# Altium PCB 8 Motors.PcbDoc (part 4 of 4)
Units mm, origin at the board's own origin, x right, y up, seen from the top; angles counter-clockwise.
Board outline 155 x 95 mm, 4 copper layers (Top Layer, GND, POWER, Bottom Layer), stack 0.778 mm thick; 196 components, 175 nets, 825 pads, 449 vias.
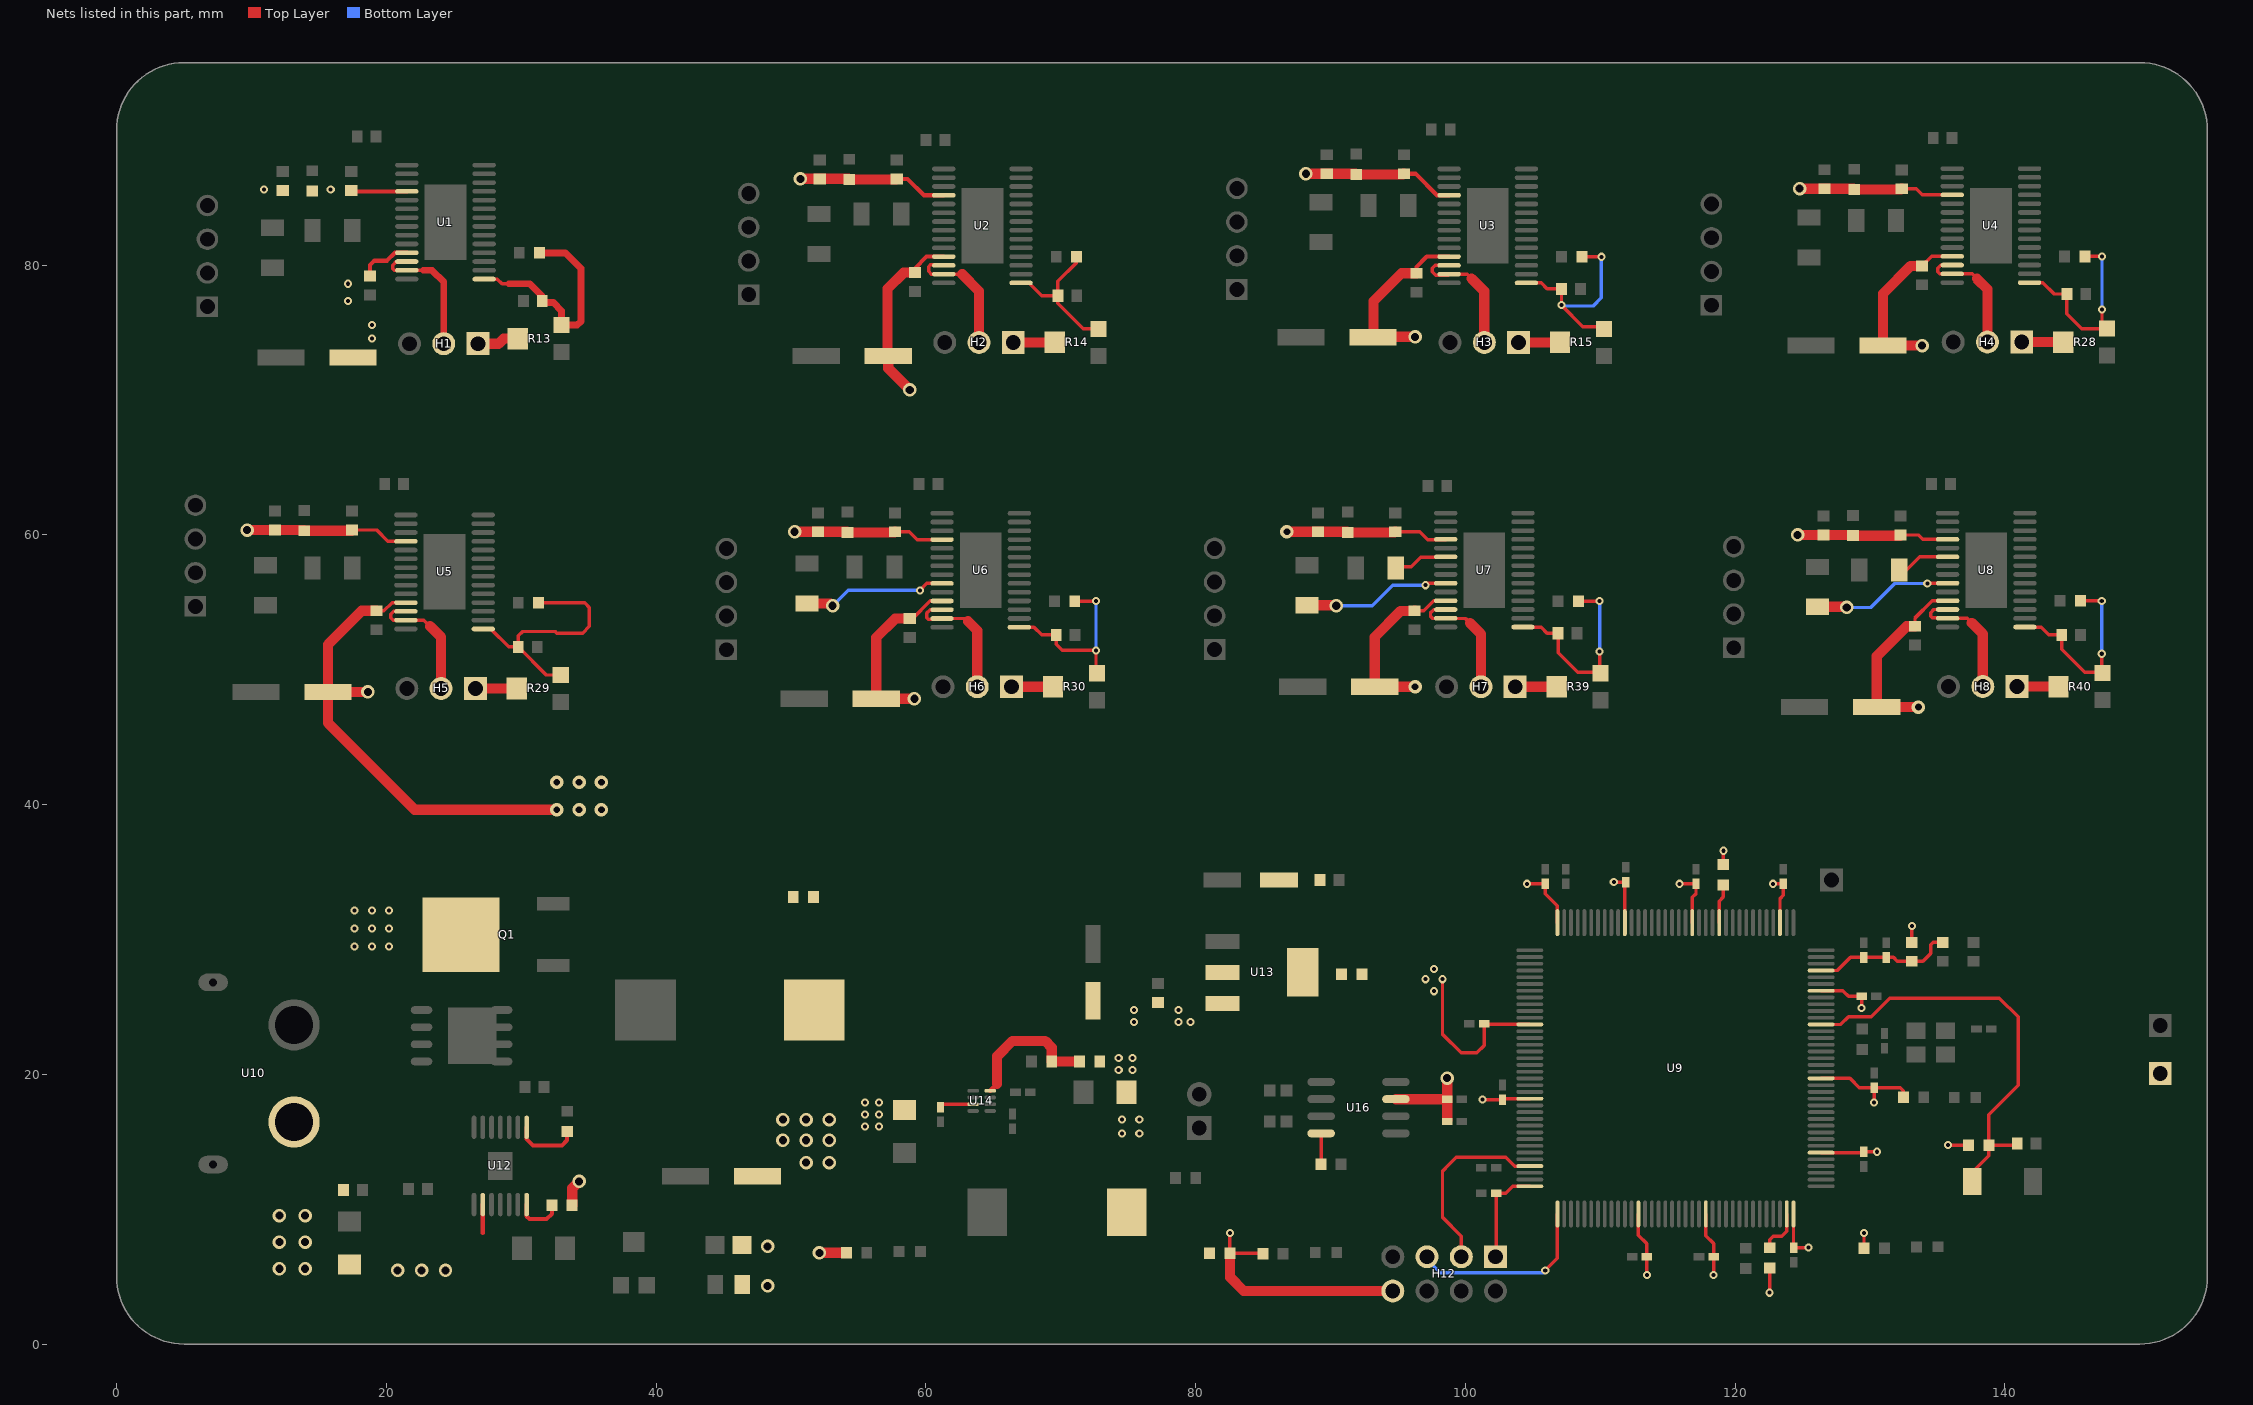
[diagram p5: the nets of this part, all layers, seen from the top]

## Via types
v1: diameter 0.6, hole 0.3, Top Layer to Bottom Layer, tented both sides, 222 vias
v2: diameter 0.5, hole 0.3, Top Layer to Bottom Layer, tented both sides, 96 vias
v3: diameter 1, hole 0.6, Top Layer to Bottom Layer, tented both sides, 88 vias
v4: diameter 1, hole 0.6, Top Layer to Bottom Layer, 17 vias
v5: diameter 1, hole 0.5, Top Layer to Bottom Layer, tented both sides, 16 vias
v6: diameter 4, hole 3.2, Top Layer to Bottom Layer, tented both sides, 4 vias
v7: diameter 0.61, hole 0.305, Top Layer to Bottom Layer, tented both sides, 4 vias
v8: diameter 0.6, hole 0.3, Top Layer to Bottom Layer, 2 vias

## Nets (pads, with @x,y where several pads share a name; then routed paths per layer and width w, separated by ;. In a path a pad name is that pad's centre, name@x,y a point inside that pad or via, vN(x,y) a via of type N, cw(c..) or ccw(c..) an arc to the next point about the centre after c; other vN are vias at no path point) (continued)
NetR24_2: R24.2 U6.9 | length 10.8
  Top Layer w0.254: v1(59.563,55.88) 60.078,56.395 U6.9@61.197,56.395
  Top Layer w0.762: R24.2@51.181,54.909 52.914,54.909 v3(53.086,54.737)
  Bottom Layer w0.254: v3(53.086,54.737) 54.229,55.88 v1(59.563,55.88)
NetR33_2: R33.2 U7.6 | length 4
  Top Layer w0.254: R33.2@94.824,57.624 95.978,57.624 96.699,58.345 U7.6@98.535,58.345
NetR34_2: R34.2 U8.6 | length 4
  Top Layer w0.254: R34.2@132.162,57.404 132.715,57.404 133.671,58.36 U8.6@135.746,58.36
NetR35_2: R35.2 U7.9 | length 11
  Top Layer w0.254: v1(97.028,56.261) 97.162,56.395 U7.9@98.535,56.395
  Top Layer w0.762: R35.2@88.265,54.782 90.379,54.782 v3(90.424,54.737)
  Bottom Layer w0.254: v3(90.424,54.737) 93.091,54.737 94.615,56.261 v1(97.028,56.261)
NetR36_2: R36.2 U8.9 | length 10.4
  Top Layer w0.254: v3@128.225,54.655 v3(128.27,54.61) ; v1(134.239,56.388) 134.261,56.41 U8.9@135.746,56.41
  Top Layer w0.762: R36.2@126.111,54.655 v3@128.225,54.655
  Bottom Layer w0.254: v3(128.27,54.61) 130.048,54.61 131.826,56.388 v1(134.239,56.388)
NetR41_2: R41.2 U9.143 | length 3.4
  Top Layer w0.254: R41.2@122.555,7.141 122.555,7.747 122.809,8.001 123.444,8.001 123.82,8.377 U9.143@123.82,9.647
NetR47_1: R47.1 U12.8 | length 4.9
  Top Layer w0.305: U12.8@30.398,16.074 30.398,15.195 30.861,14.732 33.02,14.732 33.401,15.113 R47.1@33.401,15.757
NetR50_1: R50.1 R51.2 U14.8 | length 10.6
  Top Layer w0.305: U14.8@64.767,18.784 65.278,19.295
  Top Layer w0.762: 65.278,19.295 65.278,21.336 66.421,22.479 68.834,22.479 69.333,21.98 R51.2@69.333,20.955 R50.1@71.383,20.955
NetR56_1: R56.1 U16.8 | length 2.3
  Top Layer w0.254: R56.1@89.281,13.335 89.303,13.357 U16.8@89.303,15.621
NetU11_1: U11.1 U12.7 | length 3.6
  Top Layer w0.305: U12.7@30.398,10.342 30.398,9.48 30.607,9.271 31.877,9.271 32.267,9.661 U11.1@32.267,10.287
"PB2 BOOT1": R44.1 U9.48 | length 2.9
  Top Layer w0.254: U9.48@118.82,31.247 118.82,32.841 119.126,33.147 R44.1@119.126,34.045
R_Vref1: H1.1 R13.2 | length 3.1
  Top Layer w0.762: H1.1@26.797,74.168 28.321,74.168 28.702,74.549 R13.2@29.744,74.549
R_Vref2: H2.1 R14.2 | length 3.1
  Top Layer w0.762: H2.1@66.476,74.261 R14.2@69.55,74.261
R_Vref3: H3.1 R15.2 | length 3.1
  Top Layer w0.762: H3.1@103.941,74.261 R15.2@107.015,74.261
R_Vref4: H4.1 R28.2 | length 3.1
  Top Layer w0.762: H4.1@141.241,74.286 R28.2@144.315,74.286
R_Vref5: H5.1 R29.2 | length 3.1
  Top Layer w0.762: H5.1@26.598,48.607 R29.2@29.672,48.607
R_Vref6: H6.1 R30.2 | length 3.1
  Top Layer w0.762: H6.1@66.349,48.734 R30.2@69.423,48.734
R_Vref7: H7.1 R39.2 | length 3.1
  Top Layer w0.762: H7.1@103.687,48.734 R39.2@106.761,48.734
R_Vref8: H8.1 R40.2 | length 3.1
  Top Layer w0.762: H8.1@140.898,48.749 R40.2@143.972,48.749
RESET: C67.2 R45.1 SW1.1 U9.25 | length 31.7
  Top Layer w0.254: U9.25@126.37,23.697 127.837,23.697 128.397,24.257 130.074,24.257 131.471,25.654 139.573,25.654 140.97,24.257 140.97,19.177 138.802,17.009 R45.1@138.802,14.753 ; SW1.1@137.577,12.065 137.577,12.736 138.802,13.961 R45.1@138.802,14.753 ; C67.2@140.905,14.859 140.799,14.753 R45.1@138.802,14.753
SWCLK: H12.5 U9.109 | length 14
  Top Layer w0.254: v1(105.918,5.461) 106.82,6.363 U9.109@106.82,9.647
  Bottom Layer w0.254: H12.5@97.155,6.477 97.155,6.276 98.134,5.297 105.754,5.297 v1(105.918,5.461)
SWDIO: H12.3 U9.105 | length 14.1
  Top Layer w0.254: H12.3@99.695,6.477 99.695,8.001 98.298,9.398 98.298,12.827 98.811,13.34 98.811,13.342 99.312,13.843 102.997,13.843 103.643,13.197 U9.105@104.77,13.197
VCC_+3.3V: C49.1 C55.1 C56.1 C57.1 C58.1 C59.1 C60.1 C61.1 C62.1 C63.1 C64.1 C65.1 C66.1 C86.1 C87.1 H11.1 H12.1 L1.2 R41.1 R44.2 R45.2 R46.2 R52.2 R54.2 U9.6 U9.17 U9.30 U9.39 U9.52 U9.62 U9.72 U9.84 U9.95 U9.108 U9.121 U9.131 U9.144 U16.3 | length 83.5
  Top Layer w0.254: v1(98.298,27.051) 98.298,22.987 99.695,21.59 100.838,21.59 101.383,22.135 C64.1@101.383,23.727 ; v1(101.256,18.124) C66.1@102.743,18.124 102.816,18.197 U9.95@104.77,18.197 ; C64.1@101.383,23.749 C64.1@101.383,23.727 ; H12.1@102.235,6.477 102.272,6.514 C61.1@102.272,11.176 102.997,11.176 103.518,11.697 U9.108@104.77,11.697 ; v1(104.558,34.126) C57.1@105.918,34.126 105.918,33.401 106.82,32.499 U9.72@106.82,31.247 ; U9.84@104.77,23.697 104.74,23.727 C64.1@101.383,23.727 ; v1(110.998,34.253) C56.1@111.887,34.253 111.82,34.186 U9.62@111.82,31.247 ; U9.121@112.82,9.647 112.82,8.084 113.448,7.456 C62.1@113.448,6.477 v1(113.448,5.117) ; v1(115.861,34.126) C55.1@117.094,34.126 117.094,33.401 116.82,33.127 U9.52@116.82,31.247 ; U9.131@117.82,9.647 117.82,8.037 118.401,7.456 C63.1@118.401,6.477 v1(118.401,5.117) ; R44.2@119.126,35.551 v1(119.126,36.576) ; v1(122.555,3.81) R41.1@122.555,5.634 ; v1(122.809,34.126) C58.1@123.571,34.126 123.571,33.274 123.32,33.023 U9.39@123.32,31.247 ; U9.144@124.32,9.647 124.32,7.162 C65.1@124.333,7.149 v1(125.439,7.149) ; U9.6@126.37,14.197 129.476,14.197 C49.1@129.54,14.261 v1(130.519,14.261) ; U9.17@126.37,19.697 128.512,19.697 129.196,19.013 C59.1@130.302,19.013 ; U9.30@126.37,26.197 127.979,26.197 128.009,26.167 128.011,26.167 128.397,25.781 C60.1@129.376,25.781 v1(129.376,24.929) ; R52.2@129.549,7.112 v1(129.549,8.246) ; v1(130.302,17.907) C59.1@130.302,19.013 ; R46.2@132.47,18.288 132.47,18.787 132.244,19.013 C59.1@130.302,19.013 ; L1.2@133.096,29.783 v1(133.096,30.988) ; v1(135.784,14.753) R45.2@137.296,14.753
  Top Layer w0.762: U16.3@94.847,18.161 C86.1@98.642,18.161 ; C87.1@98.642,16.637 C86.1@98.642,18.161 ; v3(98.642,19.722) C86.1@98.642,18.161
  other v1: 97.663,26.162 97.028,27.051 97.663,27.813
VCC_+3.3V_1: C81.1 C83.1 R54.1 U13.2 U13.4
VCC_+5V: C80.1 C82.1 H12.8 R49.2 R55.2 U13.3 | length 18.2
  Top Layer w0.254: v1(82.541,8.246) R55.2@82.541,6.731 ; R55.2@82.55,6.722 R55.2@82.541,6.731 ; R49.2@84.98,6.7 ccw(c84.949,6.7) 84.949,6.731 R55.2@82.541,6.731
  Top Layer w0.762: R55.2@82.55,6.722 82.55,4.953 83.566,3.937 H12.8@94.615,3.937
  other v1: 75.438,23.876 78.74,23.876 79.629,23.876 75.438,24.765 78.74,24.765
VCC_+5V_1: C85.2 L4.2 R50.2 R55.1
  other v1: 74.549,15.621 75.819,15.621 74.549,16.637 75.819,16.637 74.295,20.32 75.311,20.32 74.295,21.209 75.311,21.209
VCC_+24V: C70.2 C71.2 C78.2 C79.2 Q1.2 U10.3 U11.2 U12.2 U14.3 U15.2 | length 8.6
  Top Layer w0.254: C79.2@61.087,17.563 61.308,17.784 U14.3@63.503,17.784
  Top Layer w0.305: 27.148,8.225 U12.2@27.148,10.342
  Top Layer w0.762: U11.2@33.773,10.287 33.773,11.548 v3(34.29,12.065) ; v3(52.102,6.763) U15.2@54.111,6.763
  other v1: 55.499,16.129 56.515,16.129 55.499,17.018 56.515,17.018 55.499,17.907 56.515,17.907 17.653,29.464 18.923,29.464 20.193,29.464 17.653,30.797 18.923,30.797 20.193,30.797 17.653,32.131 18.923,32.131 20.193,32.131
  other v3: 20.828,5.461 22.606,5.461 24.384,5.461 12.065,5.588 13.97,5.588 12.065,7.556 13.97,7.556 12.065,9.525 13.97,9.525
VDD_1: C14.2 R10.2 R13.3 U1.15 | length 16.8
  Top Layer w0.254: U1.15@27.25,78.96 28.228,78.96 28.575,78.613 29.083,78.613
  Top Layer w0.508: 29.083,78.613 30.607,78.613 C14.2@31.561,77.659 ; R10.2@31.36,80.899 33.274,80.899 34.417,79.756 34.417,75.819 34.147,75.549 R13.3@32.994,75.549 32.994,76.607 32.385,77.216 31.688,77.216 C14.2@31.561,77.343 C14.2@31.561,77.532
VDD_2: C15.2 R11.2 R14.3 U2.15 | length 11
  Top Layer w0.254: U2.15@67.056,78.672 67.632,78.672 68.58,77.724 C15.2@69.785,77.724 ; R11.2@71.167,80.611 71.167,80.184 69.785,78.802 C15.2@69.785,77.724 ; R14.3@72.8,75.261 71.678,75.261 69.785,77.154 C15.2@69.785,77.724
VDD_3: C16.2 R12.2 R15.3 U3.15 | length 15.6
  Top Layer w0.254: U3.15@104.521,78.672 105.605,78.672 106.045,78.232 C16.2@107.123,78.232 v1(107.123,77.027) 108.712,75.438 110.088,75.438 R15.3@110.265,75.261 ; R12.2@108.632,80.611 v1(110.075,80.611)
  Bottom Layer w0.254: v1(107.123,77.027) 107.188,76.962 109.474,76.962 110.075,77.563 v1(110.075,80.611)
VDD_4: C31.2 R25.2 R28.3 U4.15 | length 14.8
  Top Layer w0.254: U4.15@141.821,78.697 142.791,78.697 143.637,77.851 C31.2@144.588,77.851 144.588,76.392 145.694,75.286 R28.3@147.565,75.286 147.193,75.658 v1(147.193,76.708) ; R25.2@145.931,80.636 v1(147.184,80.636)
  Bottom Layer w0.254: v1(147.184,80.636) 147.193,80.627 v1(147.193,76.708)
VDD_5: C32.2 R26.2 R29.3 U5.15 | length 18.9
  Top Layer w0.254: U5.15@27.178,53.018 27.754,53.018 29.083,51.689 C32.2@29.78,51.689 ; R26.2@31.289,54.957 34.705,54.957 35.052,54.61 35.052,53.213 34.549,52.71 32.632,52.71 32.51,52.832 30.099,52.832 29.78,52.513 C32.2@29.78,51.689 ; R29.3@32.922,49.607 31.862,49.607 C32.2@29.78,51.689
VDD_6: C33.2 R27.2 R30.3 U6.15 | length 13.7
  Top Layer w0.254: U6.15@66.929,53.145 68.013,53.145 68.58,52.578 C33.2@69.658,52.578 69.658,51.881 70.104,51.435 v1(72.61,51.435) 72.61,49.797 R30.3@72.673,49.734 ; R27.2@71.04,55.084 v1(72.61,55.084)
  Bottom Layer w0.254: v1(72.61,51.435) v1(72.61,55.084)
VDD_7: C45.2 R37.2 R39.3 U7.15 | length 14.8
  Top Layer w0.254: U7.15@104.267,53.145 105.605,53.145 106.045,52.705 C45.2@106.869,52.705 106.869,51.246 108.318,49.797 109.948,49.797 v1(109.948,51.342) ; R37.2@108.378,55.084 v1(109.948,55.084)
  Bottom Layer w0.254: v1(109.948,51.342) v1(109.948,55.084)
VDD_8: C46.2 R38.2 R40.3 U8.15 | length 14.6
  Top Layer w0.254: U8.15@141.478,53.16 142.674,53.16 143.256,52.578 C46.2@144.207,52.578 144.207,51.5 145.91,49.797 147.174,49.797 v1(147.174,51.181) ; R38.2@145.589,55.099 v1(147.174,55.099)
  Bottom Layer w0.254: v1(147.174,51.181) v1(147.174,55.099)
VDDA: C50.2 C51.2 L1.1 L2.2 U9.33 | length 10.5
  Top Layer w0.254: U9.33@126.37,27.697 127.579,27.697 128.547,28.665 C51.2@129.54,28.665 C50.2@131.191,28.665 131.736,28.665 132.018,28.383 L1.1@133.096,28.383 133.92,28.383 134.493,28.956 134.493,29.591 134.685,29.783 L2.2@135.382,29.783
VM: C4.2 C5.2 C6.2 C7.2 C8.2 C9.2 C10.1 C11.1 C12.1 C13.2 C17.2 C18.2 C22.2 C23.2 C24.2 C25.2 C26.2 C27.2 C28.1 C29.1 C30.1 C34.2 C35.2 C36.2 C39.2 C40.2 C41.2 C42.2 C43.1 C44.1 C47.2 C48.2 R1.1 R2.1 R3.1 R16.1 R17.1 R18.1 R31.1 R32.1 R53.2 U1.4 U1.11 U2.4 U2.11 U3.4 U3.11 U4.4 U4.11 U5.4 U5.11 U6.4 U6.11 U7.4 U7.11 U8.4 U8.11 | length 204.4
  Top Layer w0.254: C23.2@17.454,60.353 19.276,60.353 20.111,59.518 U5.4@21.446,59.518 ; C35.2@19.27,54.366 19.822,54.366 20.424,54.968 U5.11@21.446,54.968 ; C24.2@57.713,60.226 58.773,60.226 59.354,59.645 U6.4@61.197,59.645 ; C36.2@58.801,53.786 59.007,53.786 60.316,55.095 U6.11@61.197,55.095 ; C39.2@94.797,60.226 96.619,60.226 97.2,59.645 U7.4@98.535,59.645 ; C47.2@96.232,54.366 96.911,54.366 97.64,55.095 U7.11@98.535,55.095 ; C40.2@132.262,59.987 133.561,59.987 133.888,59.66 U8.4@135.746,59.66 ; C22.2@132.351,85.651 133.424,85.651 133.878,85.197 U4.4@136.089,85.197 ; C48.2@133.331,53.223 133.331,53.829 134.612,55.11 U8.11@135.746,55.11 ; C34.2@133.849,79.931 134.565,80.647 U4.11@136.089,80.647
  Top Layer w0.305: C4.2@17.399,85.533 17.472,85.46 U1.4@21.518,85.46 ; C13.2@18.796,79.186 18.796,80.01 19.106,80.32 20.043,80.32 20.634,80.91 U1.11@21.518,80.91 ; R1.1@54.258,86.388 R1.1@54.311,86.335 ; C5.2@57.787,86.335 C5.2@57.84,86.388 58.646,86.388 59.862,85.172 U2.4@61.324,85.172 ; C17.2@59.182,79.44 59.182,79.756 60.048,80.622 U2.11@61.324,80.622 ; C6.2@95.432,86.769 96.286,86.769 97.882,85.172 U3.4@98.789,85.172 ; C18.2@96.359,79.385 96.359,79.849 97.132,80.622 U3.11@98.789,80.622
  Top Layer w0.762: v3(9.68,60.353) C26.2@11.739,60.353 13.872,60.353 R17.1@13.925,60.3 17.401,60.3 C23.2@17.454,60.353 ; v3(18.635,48.353) C30.1@15.679,48.353 ; C35.2@19.27,54.366 18.171,54.366 15.679,51.874 C30.1@15.679,48.353 ; v5(32.639,39.624) 22.098,39.624 15.679,46.043 C30.1@15.679,48.353 ; v3(50.264,60.226) C27.2@51.998,60.226 54.131,60.226 R18.1@54.184,60.173 57.66,60.173 C24.2@57.713,60.226 ; v3(50.701,86.388) C8.2@52.125,86.388 R1.1@54.258,86.388 ; R1.1@54.311,86.335 C5.2@57.787,86.335 ; C11.1@57.15,73.245 57.15,78.232 58.358,79.44 C17.2@59.182,79.44 ; C11.1@57.208,73.245 57.208,72.332 v3(58.801,70.739) ; C36.2@58.801,53.786 57.723,53.786 56.319,52.382 C29.1@56.319,47.845 v3(59.148,47.845) ; v5(86.769,60.226) C41.2@89.082,60.226 91.215,60.226 R31.1@91.268,60.173 94.744,60.173 C39.2@94.797,60.226 ; v3(88.166,86.769) C9.2@89.717,86.769 91.85,86.769 R2.1@91.903,86.716 95.379,86.716 C6.2@95.432,86.769 ; C47.2@96.232,54.366 96.222,54.356 95.208,54.356 93.276,52.424 C43.1@93.276,48.734 v5(96.266,48.734) ; v3(96.266,74.676) 93.183,74.676 93.183,77.308 95.26,79.385 C18.2@96.359,79.385 ; v3(124.63,59.987) C42.2@126.547,59.987 128.68,59.987 R32.1@128.733,59.934 132.209,59.934 C40.2@132.262,59.987 ; v3(124.779,85.66) C25.2@126.619,85.66 128.759,85.66 R16.1@128.822,85.598 132.298,85.598 C22.2@132.351,85.651 ; C48.2@133.331,53.223 132.725,53.223 130.487,50.985 C44.1@130.487,47.225 v5(133.585,47.225) ; C34.2@133.849,79.931 133.017,79.931 130.957,77.871 C28.1@130.957,74.032 v3(133.858,74.032)
  other v1: 18.923,74.549 18.923,75.565 17.145,77.343 17.145,78.613 10.922,85.598 15.875,85.598
  other v5: 34.29,39.624 35.941,39.624 32.639,41.656 34.29,41.656 35.941,41.656
VM_1: C75.2 C76.1 L3.2 R48.2 R53.1
  other v4: 48.26,4.318 48.26,7.239 51.117,13.462 52.832,13.462 49.403,15.113 51.117,15.113 52.832,15.113 49.403,16.637 51.117,16.637 52.832,16.637
Vref1: H1.2 U1.12 U1.13 | length 10.2
  Top Layer w0.254: U1.12@21.518,80.26 20.738,80.26 20.466,79.988 20.466,79.737 20.593,79.61 U1.13@21.518,79.61 22.733,79.61
  Top Layer w0.508: 22.733,79.61 23.387,79.61 24.257,78.74 H1.2@24.257,74.168
Vref2: H2.2 U2.12 U2.13 | length 9.7
  Top Layer w0.254: U2.12@61.324,79.972 61.286,80.01 60.325,80.01 60.198,79.883 60.198,79.523 60.399,79.322 U2.13@61.324,79.322 62.685,79.322
  Top Layer w0.762: 62.685,79.322 63.936,78.071 H2.2@63.936,74.261
Vref3: H3.2 U3.12 U3.13 | length 9.9
  Top Layer w0.254: U3.12@98.789,79.972 97.752,79.972 97.536,79.756 97.536,79.502 97.79,79.248 98.716,79.248 U3.13@98.789,79.322 100.129,79.322 100.457,78.994
  Top Layer w0.762: 100.457,78.994 101.401,78.05 H3.2@101.401,74.261
Vref4: H4.2 U4.12 U4.13 | length 9.6
  Top Layer w0.254: U4.12@136.089,79.997 135.242,79.997 135.001,79.756 135.001,79.502 135.156,79.347 U4.13@136.089,79.347 137.569,79.347 137.922,78.994
  Top Layer w0.762: 137.922,78.994 138.701,78.215 H4.2@138.701,74.286
Vref5: H5.2 U5.12 U5.13 | length 9.6
  Top Layer w0.254: U5.12@21.446,54.318 20.536,54.318 20.32,54.102 20.32,53.848 20.5,53.668 U5.13@21.446,53.668 22.786,53.668 23.241,53.213
  Top Layer w0.762: 23.241,53.213 24.058,52.396 H5.2@24.058,48.607
Vref6: H6.2 U6.12 U6.13 | length 9.9
  Top Layer w0.254: U6.12@61.197,54.445 60.312,54.445 60.071,54.204 60.071,53.848 60.198,53.721 61.124,53.721 U6.13@61.197,53.795 62.918,53.795 63.119,53.594
  Top Layer w0.762: 63.119,53.594 63.809,52.904 H6.2@63.809,48.734
Vref7: H7.2 U7.12 U7.13 | length 9.7
  Top Layer w0.254: U7.12@98.535,54.445 97.636,54.445 97.409,54.217 97.409,53.975 97.589,53.795 100.002,53.795 100.33,53.467
  Top Layer w0.762: 100.33,53.467 101.147,52.65 H7.2@101.147,48.734
Vref8: H8.2 U8.12 U8.13 | length 9.9
  Top Layer w0.254: U8.12@135.746,54.46 134.724,54.46 134.493,54.229 134.493,53.975 134.62,53.848 135.708,53.848 U8.13@135.746,53.81 137.198,53.81 137.541,53.467
  Top Layer w0.762: 137.541,53.467 138.358,52.65 H8.2@138.358,48.749
pads on no net: RJ1.1 U1.19 U1.23 U1.27 U2.19 U2.23 U2.27 U3.19 U3.23 U3.27 U4.19 U4.23 U4.27 U5.19 U5.23 U5.27 U6.19 U6.23 U6.27 U7.19 U7.23 U7.27 U8.19 U8.23 U8.27 U9.1 U9.2 U9.3 U9.4 U9.5 U9.7 U9.8 U9.9 U9.10 U9.11 U9.12 U9.13 U9.14 U9.18 U9.19 U9.20 U9.21 U9.22 U9.26 U9.27 U9.28 U9.29 U9.34 U9.35 U9.41 U9.42 U9.49 U9.55 U9.59 U9.60 U9.66 U9.70 U9.73 U9.74 U9.78 U9.82 U9.88 U9.92 U9.97 U9.98 U9.99 U9.100 U9.103 U9.104 U9.110 U9.111 U9.112 U9.113 U9.116 U9.117 U9.118 U9.119 U9.122 U9.123 U9.124 U9.125 U9.126 U9.127 U9.128 U9.129 U9.132 U9.133 U9.134 U9.135 U9.136 U9.137 U9.139 U9.140 U9.141 U9.142 U12.3 U14.1 U14.2 U16.5
copper on no net:
  other v6: 5,5 150,5 5,90 150,90

## Polygon pours and split planes (outlines as drawn)
VCC_+3.3V_1 on Top Layer "Top Layer-No Net 1" (solid, pour order 132): 80.645,28.321 84.455,28.321 ccw(c84.455,28.575) 84.709,28.575 84.709,35.052 cw(c84.963,35.052) 84.963,35.306 89.408,35.306 cw(c89.408,35.052) 89.662,35.052 89.662,28.575 ccw(c89.916,28.575) 89.916,28.321 91.059,28.321 cw(c91.059,28.067) 91.313,28.067 91.313,25.781 cw(c91.059,25.781) 91.059,25.527 84.963,25.527 cw(c84.963,25.781) 84.709,25.781 84.709,26.67 ccw(c84.455,26.67) 84.455,26.924 80.645,26.924 cw(c80.645,27.178) 80.391,27.178 80.391,28.067 cw(c80.645,28.067)
VCC_+5V on Top Layer "Top Layer-No Net 1" (solid, remove dead copper, pour order 126): 74.549,27.051 cw(c74.549,26.67) 74.93,26.67 74.93,26.035 ccw(c75.184,26.035) 75.184,25.781 83.058,25.781 cw(c83.058,25.4) 83.439,25.4 83.439,23.495 cw(c83.058,23.495) 83.058,23.114 69.85,23.114 cw(c69.85,23.749) 69.215,23.749 69.215,26.67 cw(c69.596,26.67) 69.596,27.051
VCC_+24V on Top Layer "Top Layer-No Net 1" (solid, remove dead copper, pour order 124): 18.415,33.02 27.94,33.02 cw(c27.94,32.385) 28.575,32.385 28.575,27.94 cw(c27.94,27.94) 27.94,27.305 17.272,27.305 cw(c17.272,28.067) 16.51,28.067 16.51,32.258 cw(c17.272,32.258) 17.272,33.02
VM on Top Layer "Top Layer-No Net 1" (solid, remove dead copper, pour order 102): 18.034,85.979 cw(c18.034,85.852) 18.161,85.852 18.161,84.709 cw(c17.907,84.709) 17.907,84.455 10.668,84.455 cw(c10.668,84.709) 10.414,84.709 10.414,85.725 cw(c10.668,85.725) 10.668,85.979
GND on Top Layer "Top Layer-No Net 1" (solid, pour order 100): 20.193,78.232 ccw(c20.193,78.486) 20.447,78.486 20.447,78.867 cw(c20.701,78.867) 20.701,79.121 22.352,79.121 cw(c22.289,78.931) 22.479,78.867 22.479,77.47 cw(c22.225,77.47) 22.225,77.216 18.542,77.216 cw(c18.542,77.47) 18.288,77.47 18.288,77.978 cw(c18.542,77.978) 18.542,78.232
VM on Top Layer "Top Layer-No Net 1" (solid, remove dead copper, pour order 98): 16.256,73.914 ccw(c16.192,74.232) 16.51,74.295 16.51,79.121 cw(c16.954,79.184) 16.891,79.629 19.304,79.629 cw(c19.304,79.375) 19.558,79.375 19.558,78.867 cw(c19.431,78.867) 19.431,78.74 17.907,78.74 ccw(c17.907,78.613) 17.78,78.613 17.78,76.454 ccw(c18.034,76.454) 18.034,76.2 19.431,76.2 cw(c19.431,75.946) 19.685,75.946 19.685,72.771 cw(c19.304,72.771) 19.304,72.39 15.494,72.39 cw(c15.494,72.644) 15.24,72.644 15.24,73.66 cw(c15.494,73.66) 15.494,73.914
GND on Top Layer "Top Layer-No Net 1" (solid, remove dead copper, pour order 46): 144.526,85.979 cw(c144.526,85.725) 144.78,85.725 144.78,84.582 cw(c144.526,84.582) 144.526,84.328 141.224,84.328 cw(c141.224,84.582) 140.97,84.582 140.97,85.852 cw(c141.097,85.852) 141.097,85.979
GND on Top Layer "Top Layer-No Net 1" (solid, pour order 42): 70.612,60.452 cw(c70.612,60.198) 70.866,60.198 70.866,59.055 cw(c70.612,59.055) 70.612,58.801 66.294,58.801 cw(c66.294,59.055) 66.04,59.055 66.04,60.198 cw(c66.294,60.198) 66.294,60.452
GND on Top Layer "Top Layer-No Net 1" (solid, remove dead copper, pour order 34): 55.118,58.547 cw(c55.055,58.23) 55.372,58.166 55.372,56.642 cw(c55.118,56.642) 55.118,56.388 50.165,56.388 cw(c50.165,56.642) 49.911,56.642 49.911,58.039 cw(c50.482,57.976) 50.546,58.547
GND on Top Layer "Top Layer-No Net 1" (solid, pour order 30): 107.061,85.979 cw(c107.061,85.725) 107.315,85.725 107.315,84.582 cw(c107.061,84.582) 107.061,84.328 103.886,84.328 cw(c103.886,84.582) 103.632,84.582 103.632,85.725 cw(c103.886,85.725) 103.886,85.979
GND on Top Layer "Top Layer-No Net 1" (solid, pour order 22): 88.265,85.344 93.218,85.344 cw(c93.218,85.09) 93.472,85.09 93.472,83.566 cw(c93.218,83.566) 93.218,83.312 88.265,83.312 cw(c88.265,83.566) 88.011,83.566 88.011,85.09 cw(c88.265,85.09)
GND on Top Layer "Top Layer-No Net 1" (solid, pour order 10): 55.753,84.836 cw(c55.753,84.582) 56.007,84.582 56.007,82.931 cw(c55.753,82.931) 55.753,82.677 51.181,82.677 cw(c51.181,82.804) 51.054,82.804 51.054,84.582 cw(c51.308,84.582) 51.308,84.836
GND on Top Layer "Top Layer-No Net 1" (solid, pour order 6): 69.596,85.979 cw(c69.596,85.725) 69.85,85.725 69.85,84.582 cw(c69.596,84.582) 69.596,84.328 66.421,84.328 cw(c66.421,84.582) 66.167,84.582 66.167,85.725 cw(c66.421,85.725) 66.421,85.979
GND on Top Layer "Top Layer-No Net" (solid, remove dead copper, pour order 0): 10.795,83.693 15.494,83.693 cw(c15.494,83.439) 15.748,83.439 15.748,81.661 cw(c15.494,81.661) 15.494,81.407 10.795,81.407 cw(c10.795,81.661) 10.541,81.661 10.541,83.439 cw(c10.795,83.439)
GND on Top Layer "Top Layer-No Net" (solid, pour order 4): 29.591,86.36 cw(c29.591,86.233) 29.718,86.233 29.718,84.836 cw(c29.464,84.836) 29.464,84.582 26.67,84.582 cw(c26.67,84.836) 26.416,84.836 26.416,86.106 cw(c26.67,86.106) 26.67,86.36
GND on Top Layer "Top Layer-No Net 1" (solid, remove dead copper, pour order 50): 129.54,84.201 cw(c129.54,83.947) 129.794,83.947 129.794,82.55 cw(c129.54,82.55) 129.54,82.296 124.46,82.296 cw(c124.46,82.55) 124.206,82.55 124.206,83.947 cw(c124.46,83.947) 124.46,84.201
GND on Top Layer "Top Layer-No Net 1" (solid, remove dead copper, pour order 52): 130.175,58.42 cw(c130.175,58.166) 130.429,58.166 130.429,56.515 cw(c130.175,56.515) 130.175,56.261 125.222,56.261 cw(c125.222,56.515) 124.968,56.515 124.968,58.166 cw(c125.222,58.166) 125.222,58.42
GND on Top Layer "Top Layer-No Net 1" (solid, pour order 54): 144.399,60.452 cw(c144.399,60.198) 144.653,60.198 144.653,59.055 cw(c144.399,59.055) 144.399,58.801 140.843,58.801 cw(c140.843,59.055) 140.589,59.055 140.589,60.198 cw(c140.843,60.198) 140.843,60.452
GND on Top Layer "Top Layer-No Net 1" (solid, remove dead copper, pour order 60): 15.494,58.42 cw(c15.494,58.166) 15.748,58.166 15.748,56.642 cw(c15.494,56.642) 15.494,56.388 10.287,56.388 cw(c10.287,56.642) 10.033,56.642 10.033,58.166 cw(c10.287,58.166) 10.287,58.42
GND on Top Layer "Top Layer-No Net 1" (solid, pour order 62): 30.353,60.325 cw(c30.353,60.071) 30.607,60.071 30.607,58.928 cw(c30.353,58.928) 30.353,58.674 26.543,58.674 cw(c26.543,58.928) 26.289,58.928 26.289,60.071 cw(c26.543,60.071) 26.543,60.325
GND on Top Layer "Top Layer-No Net 1" (solid, remove dead copper, pour order 66): 92.71,58.547 cw(c92.71,58.293) 92.964,58.293 92.964,56.642 cw(c92.71,56.642) 92.71,56.388 87.249,56.388 cw(c87.249,56.642) 86.995,56.642 86.995,58.293 cw(c87.249,58.293) 87.249,58.547
GND on Top Layer "Top Layer-No Net 1" (solid, remove dead copper, pour order 70): 107.061,60.452 cw(c107.061,60.198) 107.315,60.198 107.315,59.055 cw(c107.061,59.055) 107.061,58.801 103.632,58.801 cw(c103.632,59.055) 103.378,59.055 103.378,60.198 cw(c103.632,60.198) 103.632,60.452
GND on Top Layer "Top Layer-No Net 1" (solid, remove dead copper, pour order 72): 43.561,13.208 cw(c43.561,12.573) 44.196,12.573 44.196,11.303 cw(c43.561,11.303) 43.561,10.668 41.656,10.668 ccw(c41.656,10.033) 41.021,10.033 41.021,6.858 cw(c40.386,6.858) 40.386,6.223 36.957,6.223 cw(c36.957,7.239) 35.941,7.239 35.941,11.938 cw(c37.211,11.938) 37.211,13.208
GND on Top Layer "Top Layer-No Net 1" (solid, remove dead copper, pour order 76): 59.817,14.986 ccw(c59.817,15.24) 60.071,15.24 60.071,16.637 cw(c60.325,16.637) 60.325,16.891 62.357,16.891 ccw(c62.357,17.145) 62.611,17.145 62.611,17.272 cw(c62.738,17.272) 62.738,17.399 63.754,17.399 cw(c63.754,17.272) 63.881,17.272 63.881,16.383 cw(c63.627,16.383) 63.627,16.129 63.5,16.129 ccw(c63.5,15.875) 63.246,15.875 63.246,13.081 cw(c62.992,13.081) 62.992,12.827 57.023,12.827 cw(c57.023,13.081) 56.769,13.081 56.769,14.732 cw(c57.023,14.732) 57.023,14.986
GND on Top Layer "Top Layer-No Net 1" (solid, remove dead copper, pour order 80): 17.399,10.033 ccw(c17.399,10.287) 17.653,10.287 17.653,14.351 cw(c17.907,14.351) 17.907,14.605 21.971,14.605 cw(c21.971,14.351) 22.225,14.351 22.225,10.922 cw(c21.971,10.922) 21.971,10.668 20.701,10.668 ccw(c20.701,10.414) 20.447,10.414 20.447,7.62 cw(c20.13,7.683) 20.066,7.366 19.177,7.366 cw(c19.113,7.683) 18.796,7.62 18.796,7.874 ccw(c18.542,7.874) 18.542,8.128 15.875,8.128 cw(c15.875,8.382) 15.621,8.382 15.621,9.779 cw(c15.875,9.779) 15.875,10.033
GND on Top Layer "Top Layer-No Net 1" (solid, remove dead copper, pour order 86): 22.86,26.035 cw(c22.86,25.4) 23.495,25.4 23.495,22.352 cw(c22.733,22.352) 22.733,21.59 11.43,21.59 cw(c11.43,22.225) 10.795,22.225 10.795,25.273 cw(c11.557,25.273) 11.557,26.035
GND on Top Layer "Top Layer-No Net 1" (solid, remove dead copper, pour order 88): 68.072,21.717 cw(c68.072,21.463) 68.326,21.463 68.326,20.066 ccw(c68.58,20.066) 68.58,19.812 72.263,19.812 cw(c72.263,19.558) 72.517,19.558 72.517,17.907 cw(c72.263,17.907) 72.263,17.653 67.564,17.653 cw(c67.564,17.907) 67.31,17.907 67.31,21.463 cw(c67.564,21.463) 67.564,21.717
GND on Top Layer "Top Layer-No Net 1" (solid, remove dead copper, pour order 94): 79.502,31.242 ccw(c79.502,31.496) 79.756,31.496 79.756,35.052 cw(c80.01,35.052) 80.01,35.306 83.312,35.306 cw(c83.312,35.052) 83.566,35.052 83.566,29.21 cw(c83.312,29.21) 83.312,28.956 78.74,28.956 ccw(c78.74,28.702) 78.486,28.702 78.486,26.416 cw(c78.232,26.416) 78.232,26.162 76.327,26.162 cw(c76.327,26.416) 76.073,26.416 76.073,27.813 ccw(c75.819,27.813) 75.819,28.067 70.485,28.067 cw(c70.485,28.321) 70.231,28.321 70.231,30.988 cw(c70.485,30.988) 70.485,31.242
GND on Top Layer "Top Layer-No Net 1" (solid, remove dead copper, pour order 96): 141.859,15.367 144.272,15.367 cw(c144.209,14.923) 144.653,14.859 144.653,11.049 cw(c144.399,11.049) 144.399,10.795 141.351,10.795 cw(c141.351,11.049) 141.097,11.049 141.097,13.081 cw(c141.351,13.081) 141.351,13.335 141.478,13.335 ccw(c141.478,13.589) 141.732,13.589 141.732,15.24 cw(c141.859,15.24)
NetQ1_1 on Top Layer "Top Layer-No Net 1" (solid, remove dead copper, pour order 104): 30.861,28.702 34.036,28.702 cw(c34.036,28.448) 34.29,28.448 34.29,26.797 cw(c34.036,26.797) 34.036,26.543 30.861,26.543 cw(c30.861,26.67) 30.734,26.67 30.734,28.575 cw(c30.861,28.575)
NetC75_1 on Top Layer "Top Layer-No Net 1" (solid, pour order 108): 42.672,5.08 ccw(c42.672,5.334) 42.926,5.334 42.926,8.001 cw(c43.18,8.001) 43.18,8.255 44.958,8.255 cw(c44.958,8.001) 45.212,8.001 45.212,3.556 cw(c44.958,3.556) 44.958,3.302 38.989,3.302 cw(c38.989,3.683) 38.608,3.683 38.608,4.826 cw(c38.862,4.826) 38.862,5.08
NetC72_1 on Top Layer "Top Layer-No Net 1" (solid, pour order 110): 26.416,12.065 cw(c26.416,11.811) 26.67,11.811 26.67,9.398 cw(c26.416,9.398) 26.416,9.144 22.86,9.144 cw(c22.86,9.398) 22.606,9.398 22.606,11.811 cw(c22.86,11.811) 22.86,12.065
VCC_+24V on Top Layer "Top Layer-No Net 1" (solid, remove dead copper, pour order 116): 11.43,19.05 16.637,19.05 cw(c16.574,18.479) 17.145,18.415 17.145,11.176 cw(c16.891,11.176) 16.891,10.922 15.621,10.922 ccw(c15.621,10.541) 15.24,10.541 15.24,6.985 ccw(c15.494,6.985) 15.494,6.731 26.162,6.731 ccw(c26.162,6.985) 26.416,6.985 26.416,8.255 cw(c26.67,8.255) 26.67,8.509 27.305,8.509 cw(c27.305,8.255) 27.559,8.255 27.559,4.699 cw(c27.305,4.699) 27.305,4.445 11.557,4.445 cw(c11.557,5.207) 10.795,5.207 10.795,18.415 cw(c11.43,18.415)
VCC_+24V on Top Layer "Top Layer-No Net 1" (solid, remove dead copper, pour order 118): 61.595,18.415 cw(c61.595,18.161) 61.849,18.161 61.849,17.399 cw(c61.595,17.399) 61.595,17.145 59.817,17.145 ccw(c59.817,16.891) 59.563,16.891 59.563,15.875 cw(c59.309,15.875) 59.309,15.621 55.245,15.621 cw(c55.245,15.875) 54.991,15.875 54.991,18.161 cw(c55.245,18.161) 55.245,18.415
VCC_+5V_1 on Top Layer "Top Layer-No Net 1" (solid, pour order 122): 76.454,21.717 cw(c76.454,21.463) 76.708,21.463 76.708,8.509 ccw(c76.962,8.509) 76.962,8.255 81.28,8.255 cw(c81.28,8.001) 81.534,8.001 81.534,5.969 cw(c81.28,5.969) 81.28,5.715 73.914,5.715 cw(c73.914,5.969) 73.66,5.969 73.66,19.939 ccw(c73.343,20.003) 73.406,20.32 72.517,20.32 cw(c72.517,20.574) 72.263,20.574 72.263,21.463 cw(c72.517,21.463) 72.517,21.717
NetC74_2 on Top Layer "Top Layer-No Net 1" (solid, remove dead copper, pour order 134): 24.638,25.019 34.417,25.019 ccw(c34.417,25.527) 34.925,25.527 34.925,30.861 ccw(c34.29,30.861) 34.29,31.496 31.115,31.496 cw(c31.115,32.131) 30.48,32.131 30.48,33.401 cw(c31.115,33.401) 31.115,34.036 41.275,34.036 cw(c41.275,33.401) 41.91,33.401 41.91,21.971 cw(c41.275,21.971) 41.275,21.336 36.068,21.336 ccw(c36.068,20.828) 35.56,20.828 35.56,17.78 cw(c34.735,17.716) 34.798,16.891 32.067,16.891 cw(c31.909,17.685) 31.115,17.526 31.115,20.066 ccw(c30.48,20.066) 30.48,20.701 24.765,20.701 cw(c24.765,21.463) 24.003,21.463 24.003,24.384 cw(c24.638,24.384)
VM_1 on Top Layer "Top Layer-No Net 1" (solid, remove dead copper, pour order 144): 53.467,33.909 cw(c53.467,33.655) 53.721,33.655 53.721,12.446 cw(c53.34,12.446) 53.34,12.065 49.911,12.065 ccw(c49.911,11.684) 49.53,11.684 49.53,3.556 cw(c49.149,3.556) 49.149,3.175 45.974,3.175 cw(c45.974,3.429) 45.72,3.429 45.72,17.018 cw(c46.482,17.018) 46.482,17.78 48.26,17.78 ccw(c48.26,18.288) 48.768,18.288 48.768,30.861 cw(c49.403,30.861) 49.403,31.496 50.546,31.496 ccw(c50.546,31.877) 50.927,31.877 50.927,33.528 cw(c51.308,33.528) 51.308,33.909
VM on Top Layer "Top Layer-No Net 1" (solid, remove dead copper, pour order 146): 50.546,33.655 50.546,32.766 cw(c50.292,32.766) 50.292,32.512 46.736,32.512 cw(c46.736,32.893) 46.355,32.893 46.355,38.1 ccw(c45.72,37.973) 45.593,38.608 32.131,38.608 cw(c32.131,38.989) 31.75,38.989 31.75,42.037 cw(c32.195,42.1) 32.131,42.545 49.784,42.545 cw(c49.784,41.783) 50.546,41.783 50.546,32.639
VCC_+3.3V on Top Layer "Top Layer-No Net 1" (solid, remove dead copper, pour order 136): 98.679,28.194 cw(c98.679,27.94) 98.933,27.94 98.933,25.781 cw(c98.679,25.781) 98.679,25.527 92.075,25.527 cw(c92.075,25.781) 91.821,25.781 91.821,27.813 cw(c92.202,27.813) 92.202,28.194
VCC_+5V on POWER (split plane): 95.502,1.526 60.073,1.526 60.073,37.59 95.502,37.59
VCC_+3.3V on POWER (split plane): 153.474,5 153.475,4.977 153.467,4.752 153.44,4.505 153.396,4.261 153.335,4.021 153.257,3.785 153.162,3.556 153.051,3.334 152.924,3.121 152.782,2.917 152.627,2.724 152.458,2.542 152.276,2.373 152.083,2.218 151.879,2.076 151.666,1.949 151.444,1.838 151.215,1.743 150.979,1.665 150.739,1.604 150.495,1.56 150.248,1.533 150.023,1.525 150,1.526 96.268,1.526 96.268,37.59 153.474,37.59
VM on POWER (split plane): 5,93.474 150,93.474 150.023,93.475 150.248,93.467 150.495,93.44 150.739,93.396 150.979,93.335 151.215,93.257 151.444,93.162 151.666,93.051 151.879,92.924 152.083,92.782 152.276,92.627 152.458,92.458 152.627,92.276 152.782,92.083 152.924,91.879 153.051,91.666 153.162,91.444 153.257,91.215 153.335,90.979 153.396,90.739 153.44,90.495 153.467,90.248 153.475,90.023 153.474,90 153.474,38.356 1.526,38.356 1.526,90 1.525,90.023 1.533,90.248 1.56,90.495 1.604,90.739 1.665,90.979 1.743,91.215 1.838,91.444 1.949,91.666 2.076,91.879 2.218,92.083 2.373,92.276 2.542,92.458 2.724,92.627 2.917,92.782 3.121,92.924 3.334,93.051 3.556,93.162 3.785,93.257 4.021,93.335 4.261,93.396 4.505,93.44 4.752,93.467 4.977,93.475
VCC_+24V on POWER (split plane): 59.307,1.526 5,1.526 4.977,1.525 4.752,1.533 4.505,1.56 4.261,1.604 4.021,1.665 3.785,1.743 3.556,1.838 3.334,1.949 3.121,2.076 2.917,2.218 2.724,2.373 2.542,2.542 2.373,2.724 2.218,2.917 2.076,3.121 1.949,3.334 1.838,3.556 1.743,3.785 1.665,4.021 1.604,4.261 1.56,4.505 1.533,4.752 1.525,4.977 1.526,5 1.526,37.59 59.307,37.59
GND on GND (split plane): 5,94.49 150,94.49 150.018,94.491 150.294,94.482 150.586,94.453 150.876,94.406 151.163,94.339 151.444,94.253 151.719,94.15 151.987,94.029 152.246,93.89 152.496,93.735 152.734,93.564 152.962,93.377 153.176,93.176 153.377,92.962 153.564,92.734 153.735,92.496 153.89,92.246 154.029,91.987 154.15,91.719 154.253,91.444 154.339,91.163 154.406,90.876 154.453,90.586 154.482,90.294 154.491,90.018 154.49,90 154.49,5 154.491,4.982 154.482,4.706 154.453,4.414 154.406,4.124 154.339,3.837 154.253,3.556 154.15,3.281 154.029,3.013 153.89,2.754 153.735,2.504 153.564,2.266 153.377,2.038 153.176,1.824 152.962,1.623 152.734,1.436 152.496,1.265 152.246,1.11 151.987,0.971 151.719,0.85 151.444,0.747 151.163,0.661 150.876,0.594 150.586,0.547 150.294,0.518 150.018,0.509 150,0.51 5,0.51 4.982,0.509 4.706,0.518 4.414,0.547 4.124,0.594 3.837,0.661 3.556,0.747 3.281,0.85 3.013,0.971 2.754,1.11 2.504,1.265 2.266,1.436 2.038,1.623 1.824,1.824 1.623,2.038 1.436,2.266 1.265,2.504 1.11,2.754 0.971,3.013 0.85,3.281 0.747,3.556 0.661,3.837 0.594,4.124 0.547,4.414 0.518,4.706 0.509,4.982 0.51,5 0.51,90 0.509,90.018 0.518,90.294 0.547,90.586 0.594,90.876 0.661,91.163 0.747,91.444 0.85,91.719 0.971,91.987 1.11,92.246 1.265,92.496 1.436,92.734 1.623,92.962 1.824,93.176 2.038,93.377 2.266,93.564 2.504,93.735 2.754,93.89 3.013,94.029 3.281,94.15 3.556,94.253 3.837,94.339 4.124,94.406 4.414,94.453 4.706,94.482 4.982,94.491

## Other copper
POWER (plane layer: these items are gaps in the copper):
  lines w0.762: 0,37.973 59.69,37.973 ; 59.69,0 59.69,37.973 ; 95.885,0 95.885,37.973 ; 95.885,37.719 95.885,37.973 ; 155,37.719 154.746,37.973 95.885,37.973 ; 59.69,37.973 95.885,37.973

## Silkscreen, mask and mechanical layers (free items; w line width, h text height)
Top Overlay:
  text "DAC" at 20.574,46.355 h1
  text "R_Vref" at 25.654,46.355 h1
  text "GND" at 150.622,25.4 h1
  text "-" at 15.621,23.114 h1.52
  text "+3.3" at 150.495,17.526 h1
  text "+" at 15.748,15.494 h1.52
  text "GND" at 92.964,8.128 h1
  text "SWCLK" at 95.123,8.128 h1
  text "SWDIO" at 98.425,8.128 h1
  text "+3.3" at 101.727,8.128 h1
  text "+5" at 94.107,1.651 h1
  text "GND" at 96.393,1.651 h1
  text "RX" at 99.187,1.651 h1
  text "TX" at 101.727,1.651 h1
Mechanical 1:
  the board outline again, w0.254